# EAGLE board rocketnet-daughter-14-RA-down (EAGLE 6.5.0)
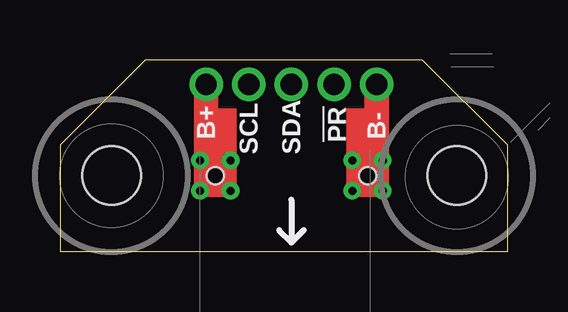
[diagram p0: board, top side]
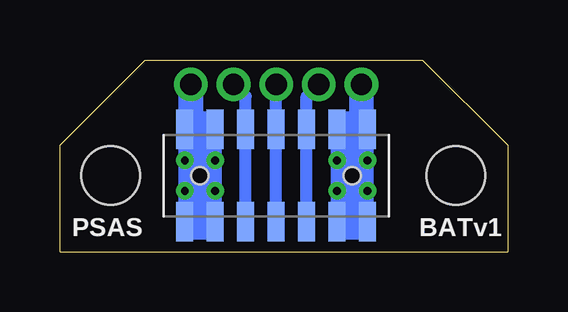
[diagram p1: board, bottom side, seen from below]

Size 18.67 x 8 mm. Coordinates in mm from the lower left corner, seen from the top.
Outline: 18.67,0 18.67,4.45 15.11,8 3.56,8 0,4.45 0,0 18.67,0
Copper layers (1*16): Top 0.035mm / dielectric 1.5mm / Bottom 0.035mm
Design rules "lpkf-s63-epl *": minimum track width 10mil, minimum drill 0.35mm, track to track 8mil, track to pad 8mil, pad to pad 8mil, via to via 8mil, smd to smd 8mil, copper to edge 10mil, drill to drill 8mil, minimum pad ring 10mil, minimum via ring 8mil, stop-mask expansion 4mil, vias tented up to drill 20mil, thermal gap 10mil
Holes 2.44 mm at 16.55,3.17 2.15,3.17

## Footprints (pad centres in the part's own frame; a part is rotated, then mirrored left to right if it is on the bottom)
HARWIN-M50-31507-NO-HOLES = smd 0.71 x 1.65: 1 -3.81,-1.925; 2 -3.81,1.925; 3 -2.54,-1.925; 4 -2.54,1.925; 5 -1.27,-1.925; 6 -1.27,1.925; 7 0,-1.925; 8 0,1.925; 9 1.27,-1.925; 10 1.27,1.925; 11 2.54,-1.925; 12 2.54,1.925; 13 3.81,-1.925; 14 3.81,1.925 | hole 0.71: 3.175,0; -3.175,0

## Placement (x,y rotation side)
E$1  [HARWIN-M50-31507-NO-HOLES]  9.65,3.17 0 bottom

## Library data of the parts
E$1 = rocketnet-connector

## Tracks (layer width: path | path; a pad name or v marks a point on that pad's centre or on a via)
!PRSNT  (via drill 0.89 pad 1.4)
  Bottom 0.508: 10.92,1.14 10.92,6.48 v11.43,6.98
B+  (via drill 0.89 pad 1.4)
  other vias: 6.1,6.98
B-  (via drill 0.89 pad 1.4)
  other vias: 13.21,6.98
S$1  (via drill 0.33)
  other vias: 5.84,2.54
S$2  (via drill 0.33)
  other vias: 7.11,2.54
S$4  (via drill 0.33)
  other vias: 12.19,2.54
S$5  (via drill 0.33)
  other vias: 13.46,2.54
S$6  (via drill 0.33)
  other vias: 5.84,3.81
S$7  (via drill 0.33)
  other vias: 7.11,3.81
S$8  (via drill 0.33)
  other vias: 12.19,3.81
S$9  (via drill 0.33)
  other vias: 13.46,3.81
SCL  (via drill 0.89 pad 1.4)
  Bottom 0.508: 8.38,1.14 8.38,6.48 v7.87,6.98
SDA  (via drill 0.89 pad 1.4)
  Bottom 0.508: 9.65,1.14 v9.65,6.98
(copper drawn outside any net)
  shapes: Bottom area x4, Top area x5

## Text on the board
tPlace: B+ | B- | SCL | SDA | !PR
bPlace: BATv1 | PSAS
Reference: #2-56 nylock / (5/32" OD)
tDocu: TOP VIEW (M50 on bottom of board) | Edge of top plate | Edge of RNH PCB | Nut OD | Tool OD | Wire bundle info | Brown (PWR) wire: 0.055" OD / CAT6 wire: 0.040" OD | Entire "ribbon": 0.275 in